# EAGLE board l1 (EAGLE 9.7.0)
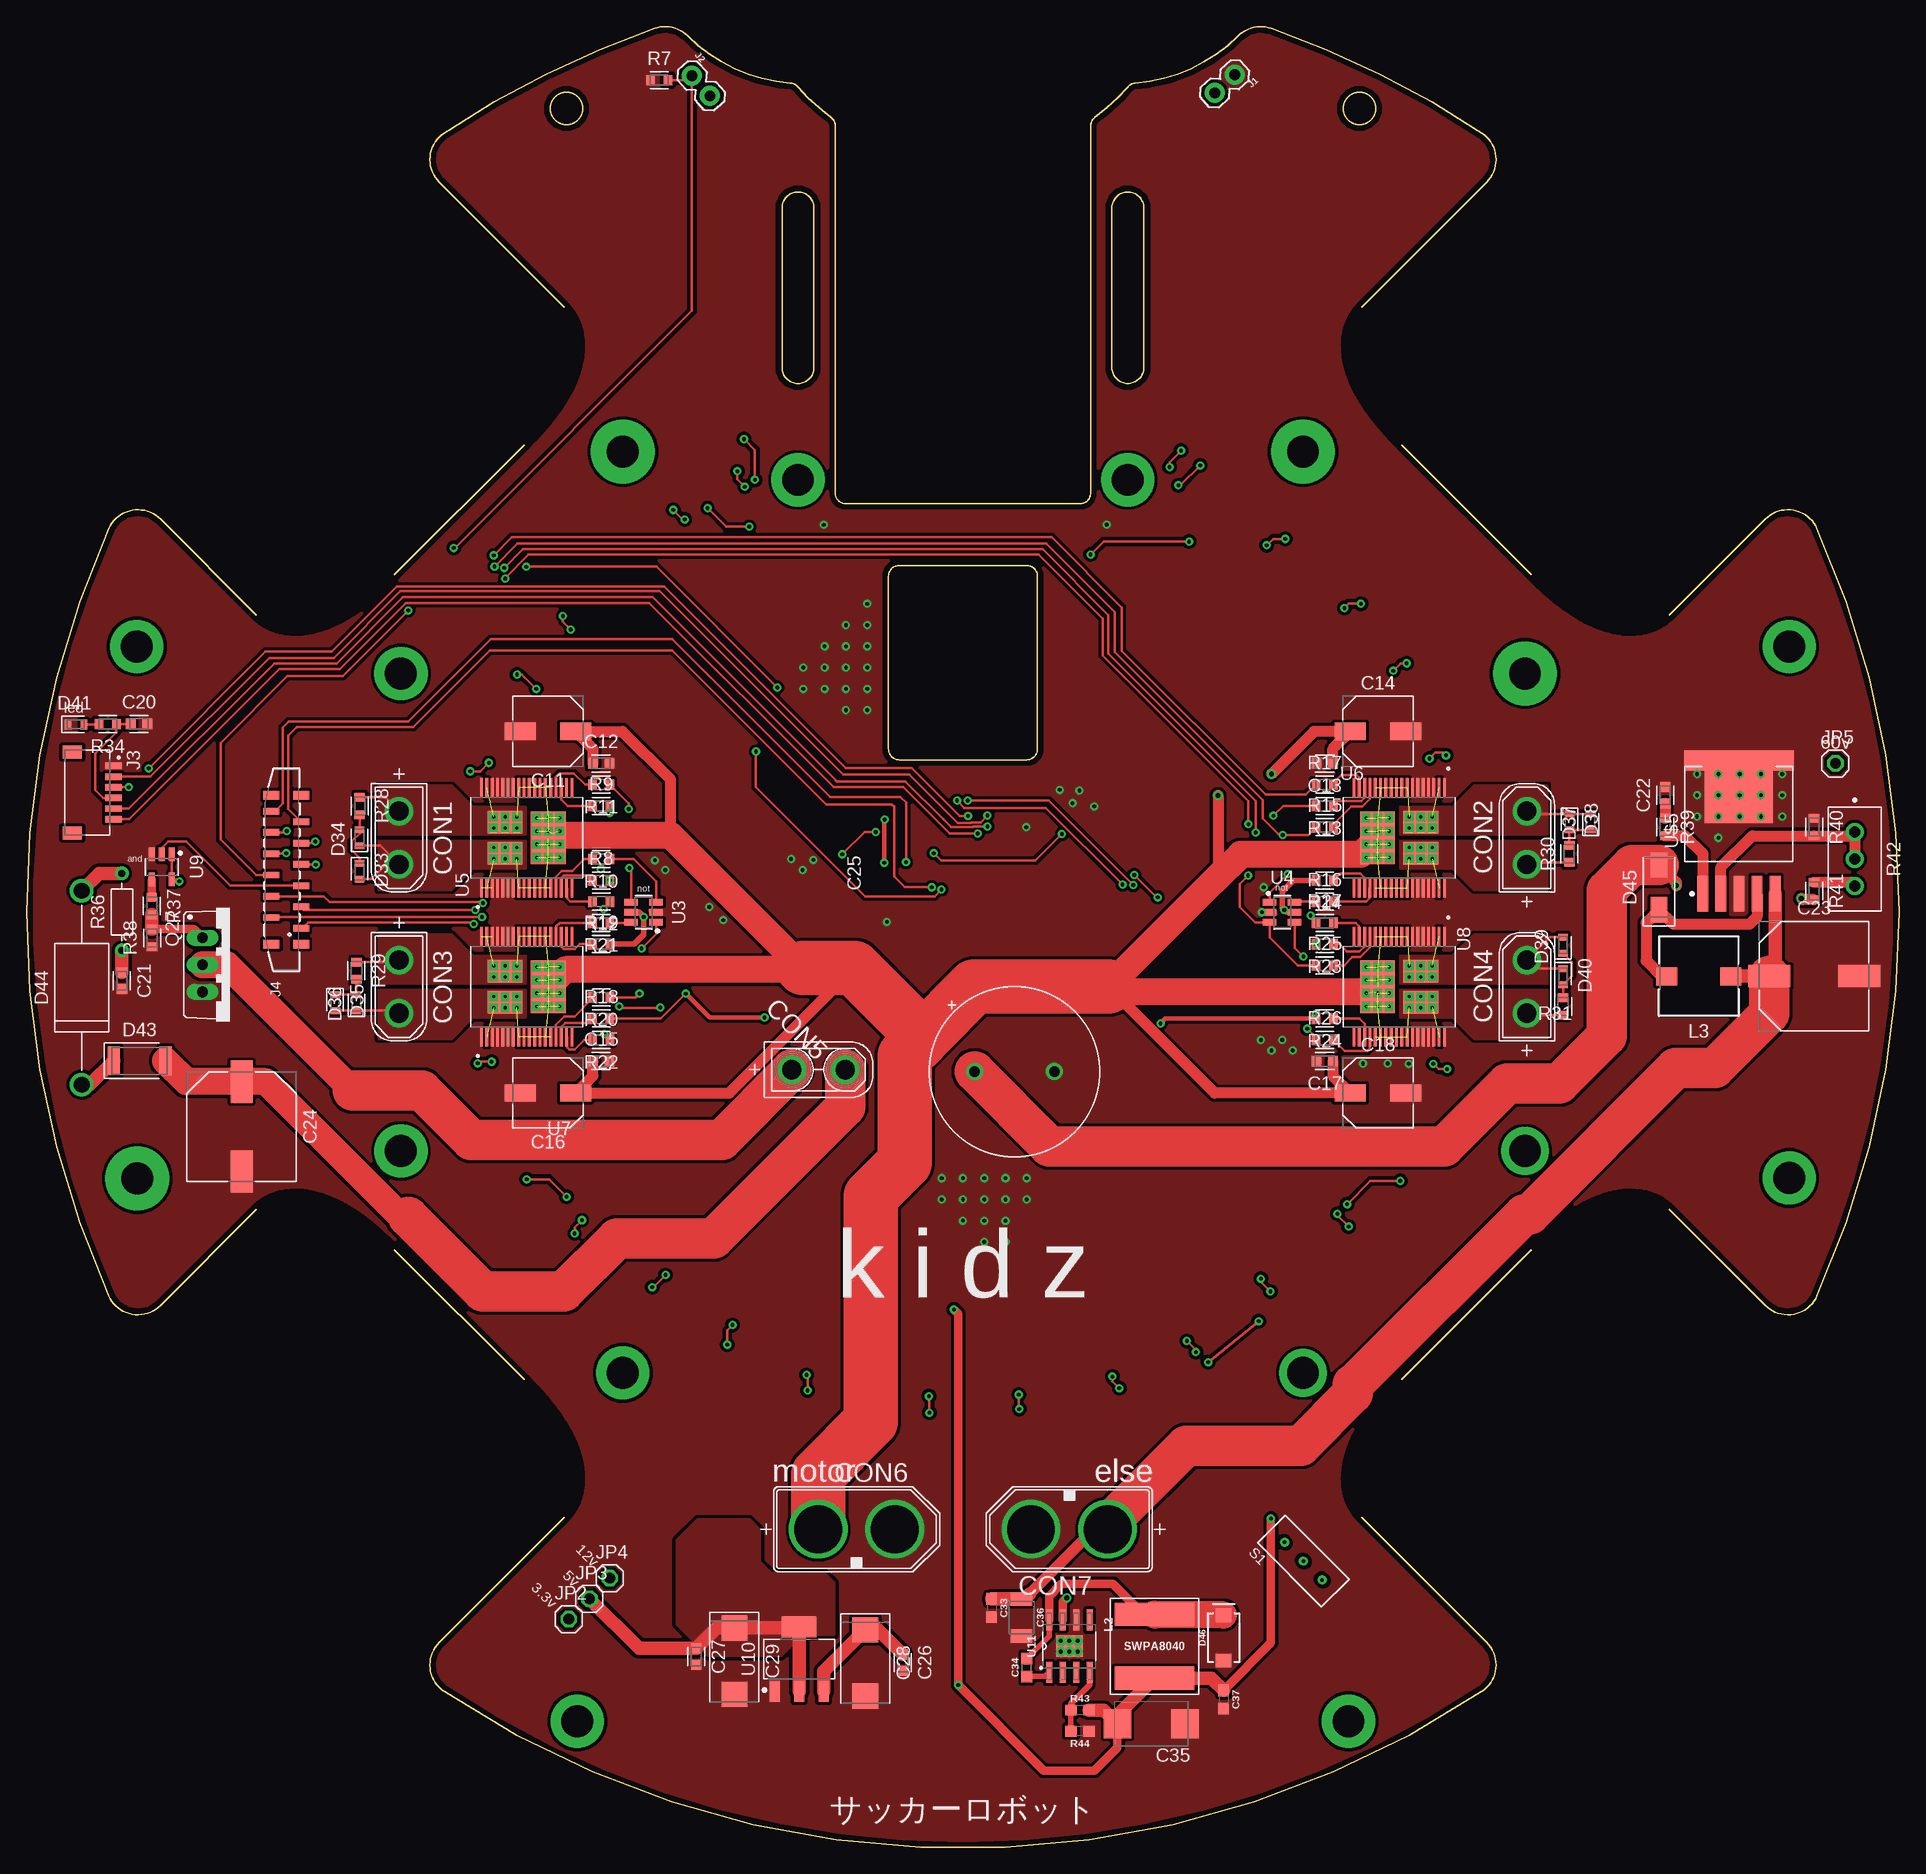
[diagram p0: board, top side]
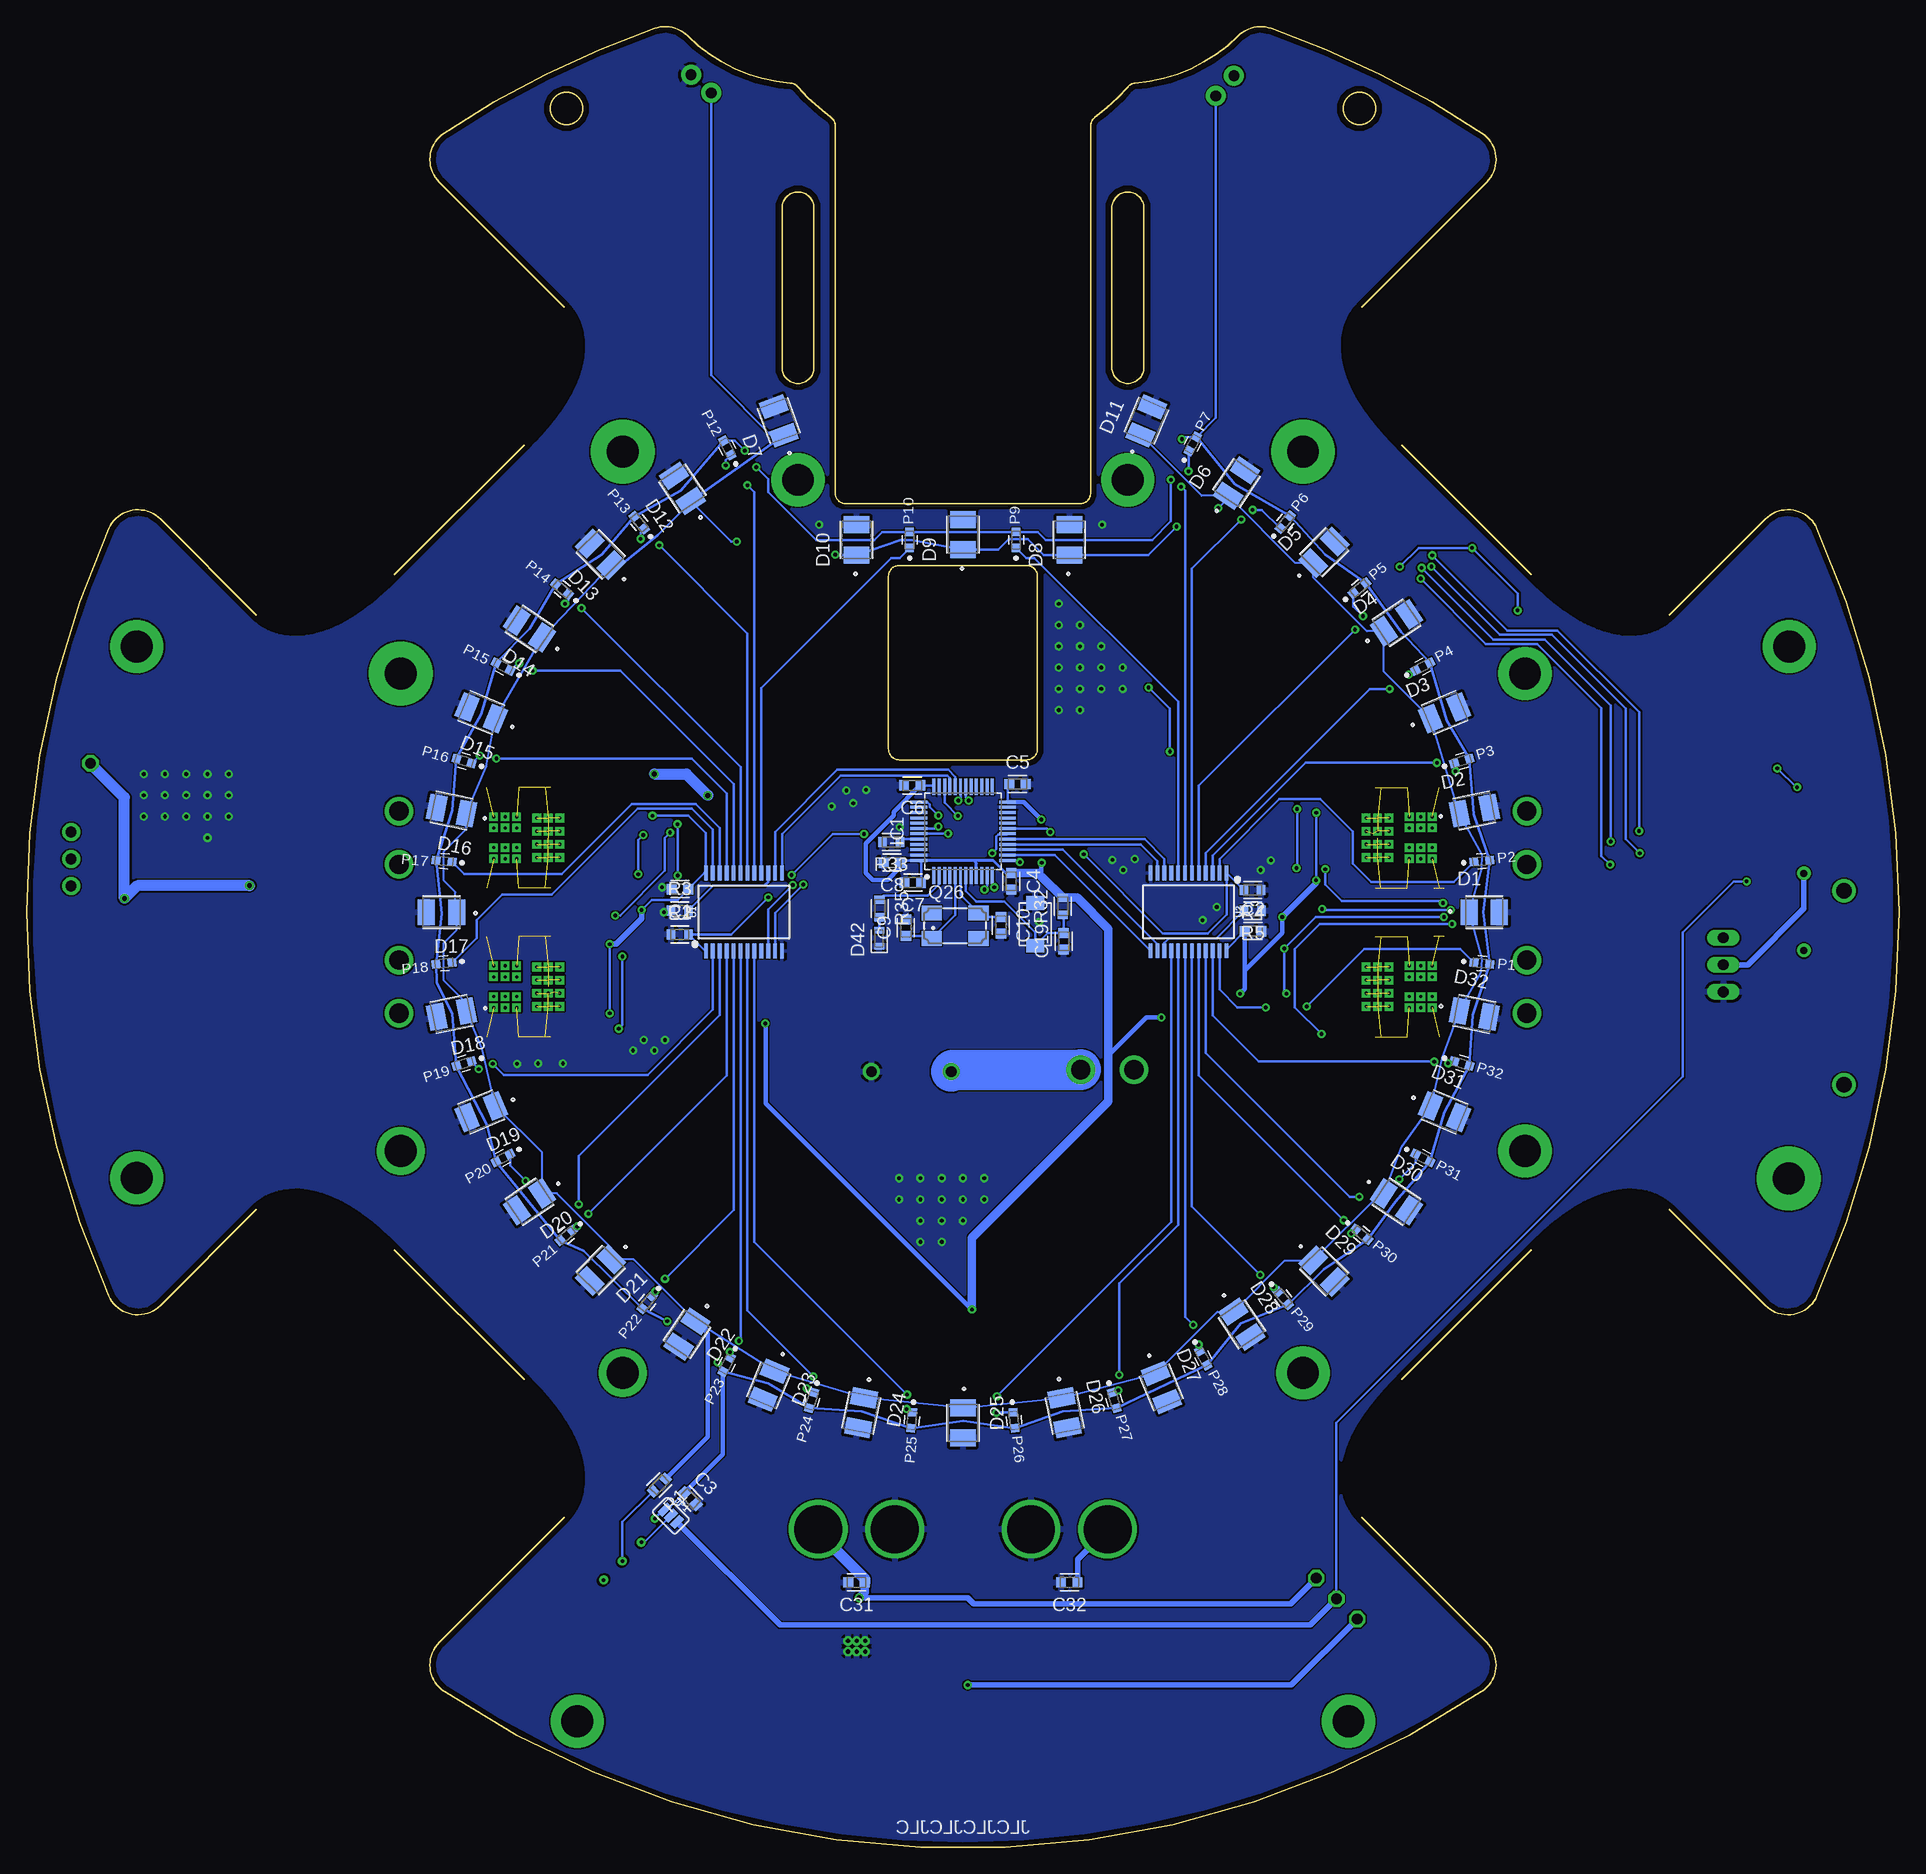
[diagram p1: board, bottom side, seen from below]

Size 176 x 171.17 mm. Coordinates in mm from the lower left corner, seen from the top.
Outline: 50.53,144.8 38.78,156.55 arc-101 39.24,161.16 arc-14 59.02,171 arc-64 62.13,170.3 arc40 71.78,165.86 arc-44 72.45,165.53 arc12 75.6,162.63 arc-53 76,161.83 76,127.32 arc90 77,126.32 99,126.32 arc90 100,127.32 100,161.83 arc-53 100.4,162.63 arc12 103.55,165.53 arc-44 104.22,165.86 arc40 113.87,170.3 arc-64 116.98,171 arc-14 136.76,161.16 arc-101 137.22,156.55 125.47,144.8
Outline: 46.75,131.83 34.57,119.64
Outline: 21.6,115.87 12.59,124.87 arc111 7.73,123.98 arc48 7.73,51.84 arc111 12.59,50.95 21.6,59.95
Outline: 34.57,56.18 46.75,43.99
Outline: 50.53,31.02 38.78,19.28 arc101 39.24,14.66 arc67 136.76,14.66 arc101 137.22,19.28 125.47,31.02
Outline: 129.25,43.99 141.43,56.18
Outline: 154.4,59.95 163.41,50.95 arc111 168.27,51.84 arc48 168.27,123.98 arc111 163.41,124.87 154.4,115.87
Outline: 141.43,119.64 129.25,131.83
Outline: 74,154.12 arc180 71,154.12 71,139.12 arc180 74,139.12 74,154.12
Outline: 95,119.51 arc90 94,120.51 82,120.51 arc90 81,119.51 81,103.24 arc90 82,102.24 94,102.24 arc90 95,103.24 95,119.51
Outline: 102,139.12 arc180 105,139.12 105,154.12 arc180 102,154.12 102,139.12
Outline: circle at 125.25,163.48 radius 1.5
Outline: circle at 50.75,163.48 radius 1.5
Copper layers (1*16): Top / Bottom
Stack-up Default Layer Stack: Top User Defined 0.035mm / Dielectric-1 User Defined 1.5mm / Bottom User Defined 0.035mm
Design rules: minimum copper width 6mil, minimum drill size 0.35mm, copper clearance wire_polygon to wire_polygon 6mil, copper clearance wire_polygon to pad_smd 6mil, copper clearance wire_polygon to via 6mil, copper clearance pad_smd to pad_smd 6mil, copper clearance pad_smd to via 6mil, copper clearance via to via 6mil, copper clearance smd to pad (same net) 6mil, copper clearance smd to via (same net) 6mil, copper clearance smd to smd (same net) 6mil, dimension clearance 20mil, restrict clearance 0mil, drill distance 6mil, keepout clearance 0mil

## Footprints (pad centres in the part's own frame; a part is rotated, then mirrored left to right if it is on the bottom)
CAPC1608X85 = smd 0.921 x 0.97: 1 -0.775,0; 2 0.775,0
6.3_X_7.7 = smd 2.917 x 1.622: 1 -2.6,0; 2 2.6,0
10_X_10.5 = smd 3.967 x 2.067: 1 -4.225,0; 2 4.225,0
16_X_25 = drill 1 pad 1.6: 1 -3.75,0; 2 3.75,0
CAPMP7343X310N = smd 2.368 x 2.404: 1 -3.121,0; 2 3.121,0
C0603 = smd 1.1 x 1: 1 -0.85,0; 2 0.85,0
D/7343-31R = smd 2.55 x 2.7: + 3.175,0; - -3.175,0
C1210 = smd 1.27 x 2.06: 1 -1.755,0; 2 1.755,0
XT30UPB-M = drill 1.8: + 2.5,0; - -2.5,0
XT30UPB-F = drill 1.8: + 2.5,0; - -2.5,0
XT60PB-M = drill 4.5: + 3.6,0; - -3.6,0
LED = smd 1.6 x 2.4: 1 -1.425,0; 2 1.425,0
LEDC1608X35N_FLAT-G = smd 0.612 x 0.912: A 0.75,0; C -0.75,0
DIOMELF5024 = smd 1.156 x 2.69: 1 -2.43,0; 2 2.43,0
DO-201AD = drill 1.47 pad 2.205: A 9.115,0; C -9.115,0
DIOM5226X290N = smd 2.392 x 1.565: 1 -2.108,0; 2 2.108,0
SMA-DIODE = smd 1.27 x 1.47: A -2.15,0; C 2.15,0
QFP50P900X900X160-48N = smd 1.559 x 0.28: 1 -4.178,2.75; 2 -4.178,2.25; 3 -4.178,1.75; 4 -4.178,1.25; 5 -4.178,0.75; 6 -4.178,0.25; 7 -4.178,-0.25; 8 -4.178,-0.75; 9 -4.178,-1.25; 10 -4.178,-1.75; 11 -4.178,-2.25; 12 -4.178,-2.75; 25 4.178,-2.75; 26 4.178,-2.25; 27 4.178,-1.75; 28 4.178,-1.25; 29 4.178,-0.75; 30 4.178,-0.25; 31 4.178,0.25; 32 4.178,0.75; 33 4.178,1.25; 34 4.178,1.75; 35 4.178,2.25; 36 4.178,2.75 | smd 0.28 x 1.559: 13 -2.75,-4.178; 14 -2.25,-4.178; 15 -1.75,-4.178; 16 -1.25,-4.178; 17 -0.75,-4.178; 18 -0.25,-4.178; 19 0.25,-4.178; 20 0.75,-4.178; 21 1.25,-4.178; 22 1.75,-4.178; 23 2.25,-4.178; 24 2.75,-4.178; 37 2.75,4.178; 38 2.25,4.178; 39 1.75,4.178; 40 1.25,4.178; 41 0.75,4.178; 42 0.25,4.178; 43 -0.25,4.178; 44 -0.75,4.178; 45 -1.25,4.178; 46 -1.75,4.178; 47 -2.25,4.178; 48 -2.75,4.178
1X02 = drill 1.016 pad 1.88: 1 0,0; 2 2.54,0
JST_SM06B-SRSS-TB(LF)(SN) = smd 0.6 x 1.55: 1 -2.5,0; 2 -1.5,0; 3 -0.5,0; 4 0.5,0; 5 1.5,0; 6 2.5,0 | smd 1.2 x 1.8: S1 -3.8,-3.875; S2 3.8,-3.875
686112183822 = smd 0.6 x 1.5: 1 -5.5,-1.8; 2 -4.5,1; 3 -3.5,-1.8; 4 -2.5,1; 5 -1.5,-1.8; 6 -0.5,1; 7 0.5,-1.8; 8 1.5,1; 9 2.5,-1.8; 10 3.5,1; 11 4.5,-1.8; 12 5.5,1 | smd 0.8 x 1.5: Z1 -7,-1.8; Z2 -7,1; Z3 7,-1.8; Z4 7,1
SMT-JUMPER_3_NO_SILK = smd 0.635 x 1.27: 1 -0.813,0; 2 0,0; 3 0.813,0
1X01 = drill 1.016 octagon: 1 0,0
SWPA8040 = smd 2.2 x 7.5: P1 -3,0; P2 3,0
WE-PD_7345R = smd 2 x 1.7: 1 -3,0; 2 3,0
ALS-PT19 = smd 0.8 x 0.8: 1 -0.75,0; 2 0.75,0
CTS406 = smd 1.9 x 1.4: 1 -2.2,-1.2; 2 2.2,-1.2; 3 2.2,1.2; 4 -2.2,1.2
TO220BV = drill 1.016 long: D 0,-2.54; G -2.54,-2.54; S 2.54,-2.54
RESC1608X60 = smd 0.799 x 0.974: 1 -0.815,0; 2 0.815,0
RESAD724W46L381D178B = drill 0.66 pad 1.26: 1 -3.62,0; 2 3.62,0
PV36X = drill 1 pad 1.7: 1 0,0; 2 2.54,0; 3 5.08,0
R0603 = smd 1.1 x 1: 1 -0.85,0; 2 0.85,0
SWITCH-TH = drill 0.33 slot 0.53: P$1 -2.5,0; P$2 0,0; P$3 2.5,0
SSOP24 = smd 0.348 x 1.397: 1 -3.575,-3.656; 2 -2.925,-3.656; 3 -2.275,-3.656; 4 -1.625,-3.656; 5 -0.975,-3.656; 6 -0.325,-3.656; 7 0.325,-3.656; 8 0.975,-3.656; 9 1.625,-3.656; 10 2.275,-3.656; 11 2.925,-3.656; 12 3.575,-3.656; 13 3.575,3.656; 14 2.925,3.656; 15 2.275,3.656; 16 1.625,3.656; 17 0.975,3.656; 18 0.325,3.656; 19 -0.325,3.656; 20 -0.975,3.656; 21 -1.625,3.656; 22 -2.275,3.656; 23 -2.925,3.656; 24 -3.575,3.656
SOT23-6 = smd 1.267 x 0.612: 1 -1.175,0.95; 2 -1.175,0; 3 -1.175,-0.95; 4 1.175,-0.95; 5 1.175,0; 6 1.175,0.95
SOP50P1030X247-39N = smd 1.79 x 0.35: 1 -4.715,4.25; 2 -4.715,3.75; 3 -4.715,3.25; 4 -4.715,2.75; 5 -4.715,2.25; 6 -4.715,1.75; 7 -4.715,1.25; 8 -4.715,0.75; 9 -4.715,0.25; 10 -4.715,-0.25; 11 -4.715,-0.75; 12 -4.715,-1.25; 13 -4.715,-1.75; 14 -4.715,-2.25; 15 -4.715,-2.75; 16 -4.715,-3.25; 17 -4.715,-3.75; 18 -4.715,-4.25; 19 4.715,-4.25; 20 4.715,-3.75; 21 4.715,-3.25; 22 4.715,-2.75; 23 4.715,-2.25; 24 4.715,-1.75; 25 4.715,-1.25; 26 4.715,-0.75; 27 4.715,-0.25; 28 4.715,0.25; 29 4.715,0.75; 30 4.715,1.25; 31 4.715,1.75; 32 4.715,2.25; 33 4.715,2.75; 34 4.715,3.25; 35 4.715,3.75; 36 4.715,4.25 | smd 2.1 x 3.25: 37 1.45,2.025; 38 -1.45,2.025 | drill 0.3 square: 37_1 1.975,0.942; 37_2 0.925,0.942; 37_3 1.975,2.025; 37_4 0.925,2.025; 37_5 1.975,3.108; 37_6 0.925,3.108; 38_1 -0.925,0.942; 38_2 -1.975,0.942; 38_3 -0.925,2.025; 38_4 -1.975,2.025; 38_5 -0.925,3.108; 38_6 -1.975,3.108; 39_1 1.856,-3.108; 39_2 0.619,-3.108; 39_3 -0.619,-3.108; 39_4 -1.856,-3.108; 39_5 1.856,-2.025; 39_6 0.619,-2.025; 39_7 -0.619,-2.025; 39_8 -1.856,-2.025; 39_9 1.856,-0.942; 39_10 0.619,-0.942; 39_11 -0.619,-0.942; 39_12 -1.856,-0.942 | smd 4.95 x 3.25: 39 0,-2.025
SOT23-5 = smd 1.267 x 0.577: 1 -1.175,0.95; 2 -1.175,0; 3 -1.175,-0.95; 4 1.175,-0.95; 5 1.175,0.95
SOT223 = smd 1.966 x 0.931: 1 -3.023,2.3; 2 -3.023,0; 3 -3.023,-2.3 | smd 1.966 x 3.241: 4 3.023,0
POWERPAD-SOIC-8 = smd 1.981 x 0.559: 1 -2.464,1.905; 2 -2.464,0.635; 3 -2.464,-0.635; 4 -2.464,-1.905; 5 2.464,-1.905; 6 2.464,-0.635; 7 2.464,0.635; 8 2.464,1.905 | smd 2.007 x 2.489: 9 0,0 | drill 0.381: P$1 -0.5,0.8; P$2 0.5,0.8; P$3 -0.5,0; P$4 0.5,0; P$5 -0.5,-0.8; P$6 0.5,-0.8
SMOL_TACTILE_3X4MM = smd 1.27 x 1.676: P$1 2,0; P$2 -2,0
TO263-5 = smd 3.357 x 1.017: 1 -5.905,3.4; 2 -5.905,1.7; 3 -5.905,0; 4 -5.905,-1.7; 5 -5.905,-3.4 | smd 6.847 x 6.397: 6 4.16,0 | smd 1.91 x 1.97: P$1 6.625,4.175; P$2 6.625,-4.175

## Placement (x,y rotation side)
C1  0.1 uF  [CAPC1608X85]  114.58,90.08 180 bottom
C2  0.1 uF  [CAPC1608X85]  60.73,86.13 0 bottom
C3  0.1 uF  [CAPC1608X85]  113.63,32.79 315 bottom
C4  0.1 uF  [CAPC1608X85]  83.45,90.83 270 bottom
C5  0.1 uF  [CAPC1608X85]  82.88,99.96 0 bottom
C6  0.1 uF  [CAPC1608X85]  92.76,99.83 180 bottom
C7  0.1 uF  [CAPC1608X85]  92.71,90.69 180 bottom
C8  4.7 uF  [CAPC1608X85]  94.67,92.57 180 bottom
C9  20 pF  [CAPC1608X85]  93.35,86.45 90 bottom
C10  20 pF  [CAPC1608X85]  84.42,86.68 270 bottom
C11  470 uF  [6.3_X_7.7]  49,104.91 180 top
C12  0.1 uF  [CAPC1608X85]  54,101.91 0 top
C13  0.1 uF  [CAPC1608X85]  122,101.91 180 top
C14  470 uF  [6.3_X_7.7]  127,104.91 0 top
C15  0.1 uF  [CAPC1608X85]  54,73.91 0 top
C16  470 uF  [6.3_X_7.7]  49,70.91 180 top
C17  0.1 uF  [CAPC1608X85]  122,73.91 180 top
C18  470 uF  [6.3_X_7.7]  127,70.91 0 top
C19  0.1 uF  [CAPC1608X85]  78.54,85.19 90 bottom
C20  0.1 uF  [CAPC1608X85]  10.57,105.62 0 top
C21  1500 pF  [CAPC1608X85]  8.96,81.47 270 top
C22  1 uF  [CAPC1608X85]  154,98.91 90 top
C23  100UF10X10.5  [10_X_10.5]  168,81.91 0 top
C24  100UF10X10.5  [10_X_10.5]  20.2,67.76 270 top
C25  1000UF  [16_X_25]  92.85,72.94 0 top
C26  0.1 uF  [CAPC1608X85]  82.33,17.38 270 top
C27  0.1 uF  [CAPC1608X85]  62.93,17.93 270 top
C28  100 uF  [CAPMP7343X310N]  78.82,17.34 270 top
C29  100 uF  [CAPMP7343X310N]  66.52,17.5 270 top
C31  0.1 uF  [CAPC1608X85]  98,24.91 180 bottom
C32  0.1 uF  [CAPC1608X85]  78,24.91 180 bottom
C33  4.7uF  [C0603]  90.7,22.51 270 top
C34  10.0nF  [C0603]  94,16.91 90 top
C35  220uF  [D/7343-31R]  105.7,11.61 180 top
C36  22.0uF  [C1210]  93.5,21.61 270 top
C37  0.1uF  [C0603]  112.5,13.91 270 top
CON1  [XT30UPB-M]  35,94.91 90 top
CON2  [XT30UPB-M]  141,94.91 270 top
CON3  [XT30UPB-M]  35,80.91 90 top
CON4  [XT30UPB-M]  141,80.91 270 top
CON5  [XT30UPB-F]  74.43,73.11 180 top
CON6  XT60PB-M  [XT60PB-M]  78,29.91 180 top
CON7  XT60PB-M  [XT60PB-M]  98,29.91 0 top
D1  [LED]  39,87.91 0 bottom
D2  [LED]  39.94,97.47 11.3 bottom
D3  [LED]  42.73,106.66 22.5 bottom
D4  [LED]  47.26,115.13 33.8 bottom
D5  [LED]  54.05,121.76 45 bottom
D6  [LED]  62.28,128.25 56.3 bottom
D7  [LED]  105.3,134.11 110 bottom
D8  [LED]  78,122.91 90 bottom
D9  [LED]  88,123.41 90 bottom
D10  [LED]  98,122.91 90 bottom
D11  [LED]  70.75,134.11 67 bottom
D12  [LED]  114.37,127.75 123.8 bottom
D13  [LED]  122.05,121.56 135 bottom
D14  [LED]  128.74,114.53 146.3 bottom
D15  [LED]  133.27,106.66 157.5 bottom
D16  [LED]  136.06,97.47 168.8 bottom
D17  [LED]  137,87.91 180 bottom
D18  [LED]  136.06,78.35 191.3 bottom
D19  [LED]  133.27,69.16 202.5 bottom
D20  [LED]  128.74,60.69 213.8 bottom
D21  [LED]  122.05,54.26 225 bottom
D22  [LED]  113.92,48.27 236.3 bottom
D23  [LED]  106.25,43.44 247.5 bottom
D24  [LED]  97.56,40.85 258.8 bottom
D25  [LED]  88,39.91 270 bottom
D26  [LED]  78.44,40.85 281.3 bottom
D27  [LED]  69.35,43.24 292.5 bottom
D28  [LED]  61.78,49.17 303.8 bottom
D29  [LED]  54.05,54.16 315 bottom
D30  [LED]  47.26,60.69 326.3 bottom
D31  [LED]  42.73,69.16 337.5 bottom
D32  [LED]  39.94,78.35 348.8 bottom
D33  [LEDC1608X35N_FLAT-G]  31.3,91.76 270 top
D34  [LEDC1608X35N_FLAT-G]  31.3,94.91 90 top
D35  [LEDC1608X35N_FLAT-G]  29,79.41 270 top
D36  [LEDC1608X35N_FLAT-G]  31,79.41 90 top
D37  [LEDC1608X35N_FLAT-G]  147,96.41 90 top
D38  [LEDC1608X35N_FLAT-G]  145,96.41 270 top
D39  [LEDC1608X35N_FLAT-G]  144.4,84.81 90 top
D40  [LEDC1608X35N_FLAT-G]  144.4,81.86 270 top
D41  [LEDC1608X35N_FLAT-G]  4.63,105.56 0 top
D42  [LEDC1608X35N_FLAT-G]  95.87,85.45 90 bottom
D43  zm4728  [DIOMELF5024]  10.61,73.95 0 top
D44  1n5401  [DO-201AD]  5.18,80.82 90 top
D45  ss510  [DIOM5226X290N]  153.41,90.24 90 top
D46  3A/40V/500mV  [SMA-DIODE]  112.5,19.71 90 top
IC1  [QFP50P900X900X160-48N]  87.98,95.54 90 bottom
J1  [1X02]  113.56,166.63 221.9 top
J2  [1X02]  62.53,166.54 311.9 top
J3  [JST_SM06B-SRSS-TB(LF)(SN)]  8.16,99.16 270 top
J4  686112183822  [686112183822]  24,91.91 90 top
JP1  [SMT-JUMPER_3_NO_SILK]  115.45,31.18 315 bottom
JP2  PINHD-1X1  [1X01]  50.95,21.46 0 top
JP3  PINHD-1X1  [1X01]  52.9,23.36 0 top
JP4  PINHD-1X1  [1X01]  54.8,25.31 0 top
JP5  PINHD-1X1  [1X01]  170,101.91 0 top
L2  SWPA8040/10uH  [SWPA8040]  106,18.91 270 top
L3  56uh  [WE-PD_7345R]  157.15,81.88 180 top
P1  [ALS-PT19]  39.24,83.11 354.4 bottom
P2  [ALS-PT19]  39.24,92.71 5.6 bottom
P3  [ALS-PT19]  41.11,102.13 16.9 bottom
P4  [ALS-PT19]  44.79,111.01 28.1 bottom
P5  [ALS-PT19]  50.72,118.4 39.4 bottom
P6  [ALS-PT19]  57.71,124.59 50.6 bottom
P7  [ALS-PT19]  66.4,131.92 61.9 bottom
P9  [ALS-PT19]  83,122.91 90 bottom
P10  [ALS-PT19]  93,122.91 90 bottom
P12  [ALS-PT19]  110.15,131.57 118.1 bottom
P13  [ALS-PT19]  118.44,124.54 129.4 bottom
P14  [ALS-PT19]  125.68,118.3 140.6 bottom
P15  [ALS-PT19]  131.21,111.01 151.9 bottom
P16  [ALS-PT19]  134.89,102.13 163.1 bottom
P17  [ALS-PT19]  136.76,92.71 174.4 bottom
P18  [ALS-PT19]  136.76,83.11 185.6 bottom
P19  [ALS-PT19]  134.89,73.69 196.9 bottom
P20  [ALS-PT19]  131.21,64.81 208.1 bottom
P21  [ALS-PT19]  125.28,57.52 219.4 bottom
P22  [ALS-PT19]  117.69,51.23 230.6 bottom
P23  [ALS-PT19]  110.2,45.4 241.9 bottom
P24  [ALS-PT19]  102.22,42.02 253.1 bottom
P25  [ALS-PT19]  92.8,40.15 264.4 bottom
P26  [ALS-PT19]  83.2,40.15 275.6 bottom
P27  [ALS-PT19]  73.78,42.02 286.9 bottom
P28  [ALS-PT19]  65.4,46 298.1 bottom
P29  [ALS-PT19]  57.91,51.63 309.4 bottom
P30  [ALS-PT19]  50.52,57.62 320.6 bottom
P31  [ALS-PT19]  44.79,64.81 331.9 bottom
P32  [ALS-PT19]  41.11,73.69 343.1 bottom
Q26  8Mhz  [CTS406]  88.74,86.64 0 bottom
Q27  IRLB3036PbF  [TO220BV]  19.08,82.97 270 top
R1  100  [RESC1608X60]  116.53,34.06 225 bottom
R2  10k  [RESC1608X60]  114.6,85.82 0 bottom
R3  10k  [RESC1608X60]  114.61,88.07 0 bottom
R4  10k  [RESC1608X60]  60.78,90 180 bottom
R5  10k  [RESC1608X60]  60.77,88.05 180 bottom
R7  10k  [RESC1608X60]  59.46,166.12 0 top
R8  1k  [RESC1608X60]  54,90.91 0 top
R9  1k  [RESC1608X60]  54,97.91 0 top
R10  1k  [RESC1608X60]  54,92.91 180 top
R11  1k  [RESC1608X60]  54,99.91 180 top
R12  10k  [RESC1608X60]  54,88.91 180 top
R13  1k  [RESC1608X60]  122,97.91 180 top
R14  1k  [RESC1608X60]  122,90.91 180 top
R15  1k  [RESC1608X60]  122,95.91 0 top
R16  1k  [RESC1608X60]  122,88.91 0 top
R17  10k  [RESC1608X60]  122,99.91 0 top
R18  1k  [RESC1608X60]  54,77.91 0 top
R19  1k  [RESC1608X60]  54,84.91 0 top
R20  1k  [RESC1608X60]  54,79.91 180 top
R21  1k  [RESC1608X60]  54,86.91 180 top
R22  10k  [RESC1608X60]  54,75.91 180 top
R23  1k  [RESC1608X60]  122,84.91 180 top
R24  1k  [RESC1608X60]  122,77.91 180 top
R25  1k  [RESC1608X60]  122,82.91 0 top
R26  1k  [RESC1608X60]  122,75.91 0 top
R27  10k  [RESC1608X60]  122,86.91 0 top
R28  ?  [RESC1608X60]  31.3,97.91 270 top
R29  ?  [RESC1608X60]  31,82.41 270 top
R30  20  [RESC1608X60]  145,93.41 90 top
R31  20  [RESC1608X60]  144.4,79.06 90 top
R32  10k  [RESC1608X60]  78.62,88.47 90 bottom
R33  10k  [RESC1608X60]  94.75,94.51 180 bottom
R34  100  [RESC1608X60]  7.62,105.6 180 top
R35  100  [RESC1608X60]  95.83,88.26 270 bottom
R36  20  [RESAD724W46L381D178B]  8.96,87.94 90 top
R37  1k  [RESC1608X60]  11.76,88.49 270 top
R38  10k  [RESC1608X60]  11.79,85.5 90 top
R39  2.94k  [RESC1608X60]  154,95.91 270 top
R40  1.5k  [RESC1608X60]  168,95.91 270 top
R41  57k  [RESC1608X60]  168,89.91 270 top
R42  10k  [PV36X]  171.82,95.45 270 top
R43  10k  [R0603]  99,12.91 0 top
R44  5.9k  [R0603]  99,10.91 180 top
S1  [SWITCH-TH]  120,26.91 315 top
U1  [SSOP24]  108.58,87.93 0 bottom
U2  [SSOP24]  66.8,87.95 180 bottom
U3  [SOT23-6]  58,87.91 180 top
U4  [SOT23-6]  118,87.91 0 top
U5  [SOP50P1030X247-39N]  47,94.91 90 top
U6  [SOP50P1030X247-39N]  129,94.91 270 top
U7  [SOP50P1030X247-39N]  47,80.91 90 top
U8  [SOP50P1030X247-39N]  129,80.91 270 top
U9  [SOT23-5]  12.7,92.17 270 top
U10  [SOT223]  72.61,17.71 90 top
U11  TPS5430  [POWERPAD-SOIC-8]  98,18.91 90 top
U$1  [SMOL_TACTILE_3X4MM]  81.22,86.78 90 bottom
U$5  [TO263-5]  160.93,95.55 90 top

## Library data of the parts
C1-C10 C12 C13 C15 C17 C19-C22 C26-C29 C31 C32 = Capacitor; CATEGORY: Capacitor
C11 C14 C16 C18 C23-C25 S1 U3 U4 U9 U10 U$5 = i want to make my own parts
C33 C34 C36 C37 L2 R43 R44 U11 = JH
C35 = rcl; SPICEPREFIX: C
CON1-CON7 = amass xt series
D1-D32 = 3528 led
D33-D42 = LED; CATEGORY: LED; COLOR: GREEN; DESCRIPTION: CHIP LED FLAT; SUB-CATEGORY: CHIP; TYPE: FLAT_TOP
D43 = Diode; CATEGORY: Diode; SUB-CATEGORY: Zener
D44 D45 = diodess
D46 = SparkFun-DiscreteSemi; PROD_ID: DIO-09886
IC1 = IC_Embedded; CATEGORY: IC_Embedded; MANUFACTURER: ST Microelectronics; MPN: STM32F103C6T7A; OPERATING_TEMP: -40 to 105 °C; PART_STATUS: Active; SUB-CATEGORY: Microcontroller; THERMALLOSS: 0.44W
J1 J2 = SparkFun-Connectors
J3 = SM06B-SRSS-TB_LF__SN_; MANUFACTURER: JST; STANDARD: Manufacturer Recommendation
J4 = Wurth_Connectors_WR-FPC; CONTACT-RESISTANCE: 30mOhm; DATASHEET-URL: https://www.we-online.com/catalog/datasheet/686112183822.pdf; IR: 1A; L: 18.8mm; MATE-WITH: WR-FFC 1.00 mm Flat Flexible Cable Type 1 (Contacts on same side)/ Type 2 (Contacts opposite); PACKAGING: Tape and Reel; PART-NUMBER: 686112183822; PINS: 12; PITCH: 1mm; TYPE: Vertical; WORKING-VOLTAGE: 125V(AC)
JP1 = SparkFun-Jumpers
JP2-JP5 = Connector; CATEGORY: CONNECTOR; SUB-CATEGORY: PIN-HEADER
L3 = Wurth_Power Magnetics_WE-PD; DATASHEET-URL: https://www.we-online.com/redexpert/spec/7447779001?ae; FRES: 100MHz; IR: 5.3A; ISAT: 9.5A; MOUNT: SMT; PART-NUMBER: 7447779001; RDC-MAX: 15mohm; RDC-TYP: 10mohm; SIZE: 7345; VERSION: Robust
P1-P7 P9 P10 P12-P32 = TR8
Q26 = crystal; OC_FARNELL: unknown; OC_NEWARK: unknown
Q27 = Transistor; CATEGORY: Transistor; SUB-CATEGORY: MOSFET; TYPE: N-Channel
R1-R5 R7-R41 = Resistor; CATEGORY: Resistor; SUB-CATEGORY: Fixed
R42 = Resistor; CATEGORY: Resistor; DESCRIPTION: Lead Sealed Type Multiturn PV36 Series; MANUFACTURER: BOURNS; MPN: PV36X; OPERATING_TEMPERATURE: -55 to +125 °C; PART_STATUS: Active; ROHS_COMPLIANCE: RoHS Compliant; SERIES: PV36; SUB-CATEGORY: Trimpot; TYPE: Lead sealed
U1 U2 = SparkFun-IC-Logic; PROD_ID: IC-08252
U5-U8 = VNH5050A-E; A1_MIN: 0.0; A_MAX: 2.47; A_MIN: 2.47; A_NOM: 2.47; B_MAX: 0.36; B_MIN: 0.18; B_NOM: 0.27; D2_MAX: 0.0; D_MAX: 10.5; D_MIN: 10.1; D_NOM: 10.3; E1_MAX: 7.6; E1_MIN: 7.4; E1_NOM: 7.5; E2_MAX: 0.0; ENOM: 0.5; E_MAX: 10.5; E_MIN: 10.1; E_NOM: 10.3; L_MAX: 1.0; L_MIN: 0.6; L_NOM: 0.8; MANUFACTURER: ST Microelectronics; PARTREV: 1.0; PIN_COUNT: 36.0; STANDARD: IPC 7351B
U$1 = smolswitch

## Nets
1S0: IC1.31 U1.10
1S1: IC1.30 U1.11
1S2: IC1.32 U1.14
1S3: IC1.33 U1.13
2S0: IC1.17 U2.10
2S1: IC1.16 U2.11
2S2: IC1.15 U2.14
2S3: IC1.14 U2.13
12V: C23.1 C31.1 C33.1 C36.1 CON7.+ JP4.1 L3.1 U11.7 U$5.5
+3.3V: C1.1 C2.1 C3.1 C4.1 C5.1 C6.1 C7.1 C8.1 C35.+ C37.1 IC1.9 IC1.24 IC1.36 IC1.48 J2.2 JP1.1 JP2.1 L2.P2 P1.2 P2.2 P3.2 P4.2 P5.2 P6.2 P7.2 P9.2 P10.2 P12.2 P13.2 P14.2 P15.2 P16.2 P17.2 P18.2 P19.2 P20.2 P21.2 P22.2 P23.2 P24.2 P25.2 P26.2 P27.2 P28.2 P29.2 P30.2 P31.2 P32.2 R8.2 R9.2 R13.2 R14.2 R18.2 R19.2 R23.2 R24.2 R32.2 R43.2 U1.24 U2.24 U3.5 U4.5
+5V: C27.1 C29.1 JP1.3 JP3.1 U9.1 U9.5 U10.2 U10.4
+12V: C26.1 C28.1 U10.3
BOOT: IC1.44 R33.1
COM1: IC1.18 R2.2 U1.1
COM2: IC1.19 R4.2 U2.1
GND: C1.2 C2.2 C3.2 C4.2 C5.2 C6.2 C7.2 C8.2 C9.2 C10.2 C11.2 C12.2 C13.2 C14.2 C15.2 C16.2 C17.2 C18.2 C19.1 C20.2 C21.2 C22.2 C23.2 C24.2 C25.2 C26.2 C27.2 C28.2 C29.2 C31.2 C32.2 C33.2 C35.- C36.2 C37.2 CON6.- CON7.- D1.2 D2.2 D3.2 D4.2 D5.2 D6.2 D7.2 D8.2 D9.2 D10.2 D11.2 D12.2 D13.2 D14.2 D15.2 D16.2 D17.2 D18.2 D19.2 D20.2 D21.2 D22.2 D23.2 D24.2 D25.2 D26.2 D27.2 D28.2 D29.2 D30.2 D31.2 D32.2 D41.C D42.C D46.A IC1.8 IC1.23 IC1.35 IC1.47 J1.1 J3.1 Q27.S R2.1 R3.1 R4.1 R5.1 R7.1 R33.2 R38.1 R40.1 R44.1 U1.12 U2.12 U3.2 U4.2 U5.1 U5.3 U5.4 U5.5 U5.6 U5.7 U5.30 U5.31 U5.32 U5.33 U5.34 U5.36 U6.1 U6.3 U6.4 U6.5 U6.6 U6.7 U6.30 U6.31 U6.32 U6.33 U6.34 U6.36 U7.1 U7.3 U7.4 U7.5 U7.6 U7.7 U7.30 U7.31 U7.32 U7.33 U7.34 U7.36 U8.1 U8.3 U8.4 U8.5 U8.6 U8.7 U8.30 U8.31 U8.32 U8.33 U8.34 U8.36 U9.3 U10.1 U11.6 U11.9 U11.P$1 U11.P$2 U11.P$3 U11.P$4 U11.P$5 U11.P$6 U$1.P$1 U$5.3 U$5.6 U$5.P$1 U$5.P$2
INA1: J4.4 R10.1 U3.3
INA2: J4.8 R15.1 U4.1
INA3: J4.2 R20.1 U3.1
INA4: J4.7 R25.1 U4.3
INB1: R11.1 U3.4
INB2: R16.1 U4.6
INB3: R21.1 U3.6
INB4: R26.1 U4.4
KICKER: J4.5 U9.2
KICKER_5V: R37.1 U9.4
LG: IC1.11 J2.1 J4.6 R7.2
MOTOR_12V: C11.1 C12.1 C13.1 C14.1 C15.1 C16.1 C17.1 C18.1 C32.1 CON6.+ U5.13 U5.24 U5.39 U5.39_1 U5.39_2 U5.39_3 U5.39_4 U5.39_5 U5.39_6 U5.39_7 U5.39_8 U5.39_9 U5.39_10 U5.39_11 U5.39_12 U6.13 U6.24 U6.39 U6.39_1 U6.39_2 U6.39_3 U6.39_4 U6.39_5 U6.39_6 U6.39_7 U6.39_8 U6.39_9 U6.39_10 U6.39_11 U6.39_12 U7.13 U7.24 U7.39 U7.39_1 U7.39_2 U7.39_3 U7.39_4 U7.39_5 U7.39_6 U7.39_7 U7.39_8 U7.39_9 U7.39_10 U7.39_11 U7.39_12 U8.13 U8.24 U8.39 U8.39_1 U8.39_2 U8.39_3 U8.39_4 U8.39_5 U8.39_6 U8.39_7 U8.39_8 U8.39_9 U8.39_10 U8.39_11 U8.39_12
N$1: JP1.2 S1.P$1
N$2: R3.2 U1.15
N$3: R10.2 U5.15
N$4: R11.2 U5.22
N$5: R12.2 U5.17
N$6: R8.1 U5.16
N$7: R9.1 U5.21
N$8: D1.1 D2.1 D3.1 D4.1 D5.1 D6.1 D7.1 D8.1 D9.1 D10.1 D11.1 D12.1 D13.1 D14.1 D15.1 D16.1 D17.1 D18.1 D19.1 D20.1 D21.1 D22.1 D23.1 D24.1 D25.1 D26.1 D27.1 D28.1 D29.1 D30.1 D31.1 D32.1 J1.2 R1.1
N$9: R5.2 U2.15
N$10: R1.2 S1.P$2
N$11: D35.C D36.A R29.2
N$12: P25.1 U1.8
N$13: P17.1 U1.22
N$14: P18.1 U1.23
N$15: D33.C D34.A R28.2
N$16: P19.1 U1.2
N$17: P20.1 U1.3
N$18: P21.1 U1.4
N$19: P22.1 U1.5
N$21: P23.1 U1.6
N$22: P24.1 U1.7
N$23: P10.1 U1.16
N$24: P12.1 U1.17
N$25: P13.1 U1.18
N$26: P14.1 U1.19
N$27: P15.1 U1.20
N$28: P16.1 U1.21
N$29: P9.1 U2.8
N$30: P1.1 U2.23
N$31: P2.1 U2.2
N$32: P3.1 U2.3
N$33: P4.1 U2.4
N$34: P5.1 U2.5
N$35: P6.1 U2.6
N$36: P7.1 U2.7
N$37: P26.1 U2.16
N$38: P27.1 U2.17
N$39: P28.1 U2.18
N$40: P29.1 U2.19
N$41: P30.1 U2.20
N$42: P31.1 U2.21
N$43: P32.1 U2.22
N$45: C34.2 D46.C L2.P1 U11.8
N$46: D41.A R34.2
N$47: R15.2 U6.15
N$48: R16.2 U6.22
N$49: R17.2 U6.17
N$50: R13.1 U6.16
N$51: R14.1 U6.21
N$52: D42.A R35.2
N$54: D37.C D38.A R30.2
N$56: CON5.+ D44.A Q27.D R36.2
N$57: R20.2 U7.15
N$58: C21.1 R36.1
N$59: R21.2 U7.22
N$60: R22.2 U7.17
N$61: R18.1 U7.16
N$62: R19.1 U7.21
N$63: D39.C D40.A R31.2
N$64: D43.1 D44.C
N$65: Q27.G R37.2 R38.2
N$66: D45.1 L3.2 U$5.4
N$67: R39.2 U$5.1
N$68: R25.2 U8.15
N$69: R26.2 U8.22
N$70: R27.2 U8.17
N$71: R23.1 U8.16
N$72: R24.1 U8.21
N$73: C22.1 R39.1
N$74: R41.1 R42.3
N$75: R40.2 R42.1 R42.2 U$5.2
N$96: R43.1 R44.2 U11.4
N$97: C34.1 U11.1
O_IN: C9.1 IC1.5 Q26.1
O_OUT: C10.1 IC1.6 Q26.3
OA1: CON1.- D33.A D34.C U5.2 U5.8 U5.9 U5.10 U5.11 U5.12 U5.14 U5.38 U5.38_1 U5.38_2 U5.38_3 U5.38_4 U5.38_5 U5.38_6
OA2: CON2.- D37.A D38.C U6.2 U6.8 U6.9 U6.10 U6.11 U6.12 U6.14 U6.38 U6.38_1 U6.38_2 U6.38_3 U6.38_4 U6.38_5 U6.38_6
OA3: CON3.- D35.A D36.C U7.2 U7.8 U7.9 U7.10 U7.11 U7.12 U7.14 U7.38 U7.38_1 U7.38_2 U7.38_3 U7.38_4 U7.38_5 U7.38_6
OA4: CON4.- D39.A D40.C U8.2 U8.8 U8.9 U8.10 U8.11 U8.12 U8.14 U8.38 U8.38_1 U8.38_2 U8.38_3 U8.38_4 U8.38_5 U8.38_6
OB1: CON1.+ R28.1 U5.23 U5.25 U5.26 U5.27 U5.28 U5.29 U5.35 U5.37 U5.37_1 U5.37_2 U5.37_3 U5.37_4 U5.37_5 U5.37_6
OB2: CON2.+ R30.1 U6.23 U6.25 U6.26 U6.27 U6.28 U6.29 U6.35 U6.37 U6.37_1 U6.37_2 U6.37_3 U6.37_4 U6.37_5 U6.37_6
OB3: CON3.+ R29.1 U7.23 U7.25 U7.26 U7.27 U7.28 U7.29 U7.35 U7.37 U7.37_1 U7.37_2 U7.37_3 U7.37_4 U7.37_5 U7.37_6
OB4: CON4.+ R31.1 U8.23 U8.25 U8.26 U8.27 U8.28 U8.29 U8.35 U8.37 U8.37_1 U8.37_2 U8.37_3 U8.37_4 U8.37_5 U8.37_6
PC13: IC1.2 R35.1
PWM1: J4.3 R12.1
PWM2: J4.10 R17.1
PWM3: J4.1 R22.1
PWM4: J4.9 R27.1
RST: C19.2 IC1.7 R32.1 U$1.P$2
RX1: IC1.43 J3.6
RX2: IC1.13 J4.12
SWCLK: IC1.37 J3.2
SWD_3V3: C20.1 J3.4 R34.1
SWDIO: IC1.34 J3.3
TX1: IC1.42 J3.5
TX2: IC1.12 J4.11
VBAT: IC1.1
VCC: C24.1 C25.1 CON5.- D43.2 D45.2 JP5.1 R41.2

## Tracks (layer width: path | path; a pad name or v marks a point on that pad's centre or on a via)
1S0  (via drill 0.35)
  Top 0.254: v104,90.46 96.05,98.41 v88.45,98.41
  Bottom 0.254: U1.10 106.31,88.16 v104,90.46 | v88.45,98.41 88.23,98.63 IC1.31
1S1  (via drill 0.35)
  Top 0.254: v87.45,98.41 88.15,97.71 95.8,97.71 v103,90.51
  Bottom 0.254: IC1.30 87.73,98.74 87.45,98.46 v87.45,98.41 | v103,90.51 105.66,87.86 U1.11
1S2
  Bottom 0.254: IC1.32 88.73,100.64 89.4,101.31 99.8,101.31 105.66,95.46 U1.14
1S3
  Bottom 0.254: U1.13 105.01,95.26 99.49,100.78 89.47,100.78 89.23,100.53 IC1.33
2S0
  Bottom 0.254: U2.10 69.08,92.94 70.93,94.79 IC1.17
2S1
  Bottom 0.254: U2.11 69.73,92.74 71.28,94.29 IC1.16
2S2
  Bottom 0.254: IC1.15 78.6,93.79 69.73,84.91 U2.14
2S3
  Bottom 0.254: U2.13 79.37,93.29 IC1.14
12V  (via drill 0.45)
  Top 0.813: v97.75,23.46 97.37,23.08 U11.7
  Top 1.016: CON7.+ 100.35,29.91 94.23,23.79
  Top 1.27: 94.23,23.79 93.81,23.37 C36.1 C33.1 | L3.1 160.18,81.91 C23.1 164.33,82.47 U$5.5
  Top 3.8: C23.1 163.78,78.39 158.65,73.26 155,73.26 141.25,59.51 140.75,59.51 124.75,43.51 124.65,43.51 124.65,42.66 119.75,37.76 109,37.76 101.6,30.36 CON7.+
  Bottom 0.508: JP4.1 57.2,22.91 87,22.91 87.55,23.46 v97.75,23.46
  Bottom 0.813: C31.1 97.23,23.99 v97.75,23.46
  Bottom 1.016: CON7.+ 101.6,29.62 97.23,25.24 C31.1
+3.3V  (via drill 0.35)
  Top 0.254: v115.8,49.46 v111.05,45.61 | R9.2 54.82,97.28 v54.8,97.26 | R24.2 121.19,78.4 v121.2,78.41 | R13.2 118.1,97.91 v117.18,96.99 | v61.95,80.26 59.6,77.91 R18.2 | v68.45,128.56 68.45,131.36 v67.43,132.39 | v108.5,131.31 107.43,130.24 v107.43,129.76
  Top 0.406: v61.95,80.26 64.2,78.01 v69.35,78.01 | R24.2 107.03,77.91 v106.57,77.46 | v80.6,92.56 80.6,96.59 v80.65,96.64
  Top 0.508: U4.5 118.4,87.91 v118.2,88.11 118,88.31 118,89.85 119.06,90.91 R14.2 | U3.5 57.55,87.91 v58,87.46 58,85.82 57.09,84.91 R19.2
  Top 0.813: C35.+ 102.53,9.39 100.35,7.21 95.6,7.21 v87.55,15.26 87.55,50.16 v87.15,50.56 | C37.1 116.95,19.21 v116.95,30.91
  Top 1.27: R43.2 101.23,12.91 C35.+ 102.53,12.44 L2.P2 111.35,15.91 C37.1
  Bottom 0.254: C7.1 91.94,92.57 IC1.48 93.67,92.79 C8.1 | C6.1 90.84,99.83 IC1.36 | C5.1 83.8,99.81 IC1.24 | JP1.1 115.76,31.76 C3.1 | P7.2 62.45,128.16 P6.2 53.95,121.51 P5.2 46.8,114.26 P4.2 42.55,105.91 P3.2 40,97.11 P2.2 39.1,87.91 P1.2 40.1,78.26 P32.2 42.75,69.11 P31.2 47.35,60.66 P30.2 54.1,54.31 P29.2 61.9,49.26 P28.2 P27.2 78.6,41.01 P26.2 87.95,40.11 P25.2 97.5,41.01 P24.2 106.3,43.61 P23.2 v111.05,45.61 | v115.8,49.46 P22.2 123.65,56.06 P21.2 P20.2 132.75,67.96 P19.2 136,78.41 137.45,81.26 P18.2 137,87.81 P17.2 136,97.46 P16.2 133.25,106.56 P15.2 128.7,114.56 P14.2 121.95,121.51 P13.2 114.5,127.56 P12.2 109.43,132.24 v108.5,131.31 | C2.1 63.23,84.41 U2.24 | v54.8,97.26 54.8,90.93 R8.2 | v121.2,78.41 121.2,84.9 R23.2 | J2.2 64.23,134.41 P7.2 | v117.18,96.99 113.8,96.99 112.16,95.34 U1.24 112.3,91.59 C1.1 114.83,89.06 117.25,89.06 v118.2,88.11 | v68.45,128.56 68.45,124.69 70.23,122.91 80.23,122.91 80.98,123.66 P9.2 P10.2 95.58,123.66 96.33,122.91 101.79,122.91 106.28,127.4 106.28,128.61 v107.43,129.76 | v67.43,132.39 67.22,132.59 P7.2
  Bottom 0.305: v116.95,30.91 116.11,31.76 JP1.1 | 87,92.79 IC1.48 | C4.1 84,91.6 85.17,92.78 85.53,92.78 85.54,92.79 87,92.79 | IC1.9 86.73,92.52 87,92.79
  Bottom 0.406: C3.1 110.55,36.96 P23.2 | C2.1 61.51,82.46 | 61.51,82.46 61.51,80.71 v61.95,80.26 | v58,87.46 58,85.96 61.51,82.46 | v87.15,50.56 106.53,69.94 106.53,77.41 v106.57,77.46 | v69.35,78.01 70.78,78.01 74.33,74.46 | 80.62,91.29 80.62,92.54 v80.6,92.56 | v80.65,96.64 82.3,98.29 IC1.24 | C8.1 93.89,92.14 95.08,90.96 96.48,90.96 97.13,91.61 97.13,94.39 94.53,96.99 94.53,97.34 92.04,99.83 C6.1
  Bottom 0.508: v118.2,88.11 118.2,87.31 120.6,84.91 R23.2 | v58,87.46 54.82,90.65 R8.2 | JP2.1 57.15,15.26 v87.55,15.26
  Bottom 0.813: v87.15,50.56 87.15,57.29 74.33,70.11 74.33,74.46 74.33,86.34 77.28,89.29 R32.2 80.62,91.29 80.94,91.6 C4.1
  other vias: 121.18,84.91 54.82,90.91
+5V  (via drill 0.35)
  Top 0.254: U9.1 U9.5 14.17,91 v14.35,90.81
  Top 1.27: U10.2 U10.4 72.5,20.62 C29.1 64.85,20.62 C27.1 57.56,18.71 JP3.1
  Bottom 0.254: JP3.1 52.9,39.91 20.35,72.46 20.35,86.01 15.55,90.81 v14.35,90.81
  Bottom 0.508: JP3.1 55.35,20.91 105.18,20.91 JP1.3
  pour Top (no thermals): 76,19.91 76,24.91 75,25.91 70,25.91 69,26.91 69,29.91 68,30.91 63,30.91 61,28.91 61,20.91 64,17.91 71,17.91 73,19.91
+12V
  Top 1.27: U10.3 74.91,16.55 C28.1 80.02,20.46 C26.1
BOOT
  Bottom 0.254: R33.1 93.66,94.79 IC1.44
COM1  (via drill 0.35)
  Top 0.254: v97.3,95.26 94.8,92.76 85.95,92.76 v85.25,93.46 | v104.1,91.41 106.2,89.31 v106.3,89.31
  Bottom 0.254: U1.1 112.24,84.27 R2.2 109.79,85.82 v106.3,89.31 | v97.3,95.26 100.25,95.26 v104.1,91.41 | v85.25,93.46 84.86,93.85 84.86,95.04 84.7,95.21 83.88,95.21 IC1.18
COM2  (via drill 0.35)
  Top 0.254: v76.65,93.36 78.75,95.46 v79.8,95.46
  Bottom 0.254: R4.2 61.62,90 U2.1 63.23,87.69 65,85.91 69.2,85.91 v76.65,93.36 | v79.8,95.46 80.13,95.79 IC1.19
GND  (via drill 0.35)  (2 unrouted)
  other vias: 74.93,124.34 101.53,124.36 119,74.91 116,75.91 118,75.91 117,74.91 129.9,73.66 127.93,73.69 125.6,73.69 60.03,91.89 59.05,92.79 64.15,88.41 65.48,87.16 71.85,92.91 73.95,92.84 72.93,91.89 80.85,87.01 93.95,95.91 116.28,90.26 116.1,87.91 97.1,99.41 98.95,99.36 98.3,98.16 100.35,97.86 79,116.91 79,114.91 79,112.91 79,110.91 79,108.91 77,108.91 77,110.91 77,112.91 77,114.91 75,112.91 75,110.91 73,110.91 73,108.91 75,108.91 77,106.91 79,106.91 88,58.91 90,58.91 92,58.91 88,60.91 86,60.91 90,60.91 92,60.91 94,60.91 94,62.91 92,62.91 90,62.91 88,62.91 86,62.91 90,56.91 92,56.91 157,100.91 159,100.91 157,98.91 159,98.91 157,96.91 159,96.91 161,96.91 161,98.91 161,100.91 163,100.91 163,98.91 163,96.91 165,96.91 165,98.91 165,100.91 159,94.91
  pour Top (isolate 0.305, rank 6, no thermals): 31,186.91 151,186.91 196,141.91 196,35.91 146,-14.09 37,-14.09 -26,48.91 -26,129.91
  pour Bottom (rank 6): 36,183.91 149,183.91 193,139.91 193,39.91 144,-9.09 39,-9.09 -20,49.91 -20,127.91
INA1  (via drill 0.35)
  Top 0.254: U3.3 59.18,90.79 57.05,92.91 R10.1 53.95,92.05 v53.95,91.96 | v42.88,88.77 42.79,88.86 28.5,88.86 27.95,89.41 J4.4
  Bottom 0.254: v53.95,91.96 53.95,90.51 52.4,88.96 43.07,88.96 v42.88,88.77
INA2  (via drill 0.35)
  Top 0.254: U4.1 116.83,89.79 v118.53,91.49 | R15.1 120.44,95.16 v118.05,95.16 117.75,95.16 116.2,96.71 116.2,98.46 102.28,112.39 102.28,116.11 95.83,122.56 46.13,122.56 v43.98,120.41 | v24.4,93.46 24.35,93.41 J4.8
  Bottom 0.254: v118.05,95.16 118.53,94.69 v118.53,91.49 | v24.4,93.46 25.73,94.79 25.73,107.06 32.67,114 37.57,114 v43.98,120.41
INA3  (via drill 0.35)
  Top 0.254: U3.1 59.18,85.89 v57.8,84.51 | v57.6,80.26 57.25,79.91 R20.1 | v42.8,87.45 23.04,87.45 J4.2
  Bottom 0.254: v57.6,80.26 57.8,80.46 v57.8,84.51 54.86,87.45 v42.8,87.45
INA4  (via drill 0.35)
  Top 0.254: R25.1 119.45,82.91 116.83,85.54 U4.3 115.45,86.96 114.03,88.39 114.03,90.59 v114.8,91.36 | v114.83,96.19 114.83,98.39 101.15,112.06 101.15,115.51 95.13,121.54 47.17,121.54 44.98,119.34 v44.98,119.27 | 25.83,92.39 J4.7 27.15,92.41 v27.18,92.39
  Bottom 0.254: v114.8,91.36 114.8,96.16 v114.83,96.19 | v44.98,119.27 38.84,113.14 34.03,113.14 28,107.11 28,93.21 v27.18,92.39
INB1  (via drill 0.35)
  Top 0.254: U3.4 56.83,91.89 v56.65,92.06 | v56.6,97.61 56.6,98.13 R11.1
  Bottom 0.254: v56.65,92.06 56.6,92.06 v56.6,97.61
INB2
  Top 0.254: U4.6 119.23,88.91 R16.1
INB3
  Top 0.254: U3.6 56.78,86.91 R21.1
INB4  (via drill 0.35)
  Top 0.254: U4.4 119.18,84.56 119.98,83.76 v120,83.76 | v120.35,76.96 121.19,76.13 R26.1
  Bottom 0.254: v120,83.76 120,77.31 v120.35,76.96
KICKER
  Top 0.254: U9.2 12.7,93.96 13.3,94.56 15,94.56 19.15,90.41 J4.5 25.73,90.34
KICKER_5V
  Top 0.813: U9.4 R37.1
LG  (via drill 0.35)
  Top 0.254: R7.2 62.11,166.12 J2.1 62.53,144.44 40.25,122.16 v40.15,122.16 | v35.88,116.29 35.88,116.26 29.73,110.11 24.5,110.11 18.23,103.84 18.23,94.76 21.58,91.41 J4.6 | v85.98,90.05 85.34,89.41 78.8,89.41 68.55,99.66 v68.55,103.01 | v70.55,109.04 59.2,120.39 v46.95,120.39
  Bottom 0.254: v35.88,116.29 35.88,117.89 v40.15,122.16 45.18,122.16 v46.95,120.39 | IC1.11 85.73,90.41 85.98,90.16 v85.98,90.05 | v68.55,103.01 68.55,107.04 v70.55,109.04
MOTOR_12V  (via drill 0.45)  (56 unrouted)
  Top 1.016: C15.1 53.23,72.54 C16.1 66.05,70.91 77.8,82.66 | C12.1 53.23,103.29 C11.1 56,104.91 60.5,100.41 60.5,95.16 | C13.1 122.78,103.29 C14.1 121,104.91 v117,100.91 | C17.1 122.78,72.54 C18.1 111.65,70.91 101.65,80.91 | v111.98,98.89 111.98,91.24 111.63,90.89
  Top 2.54: 49.43,95.31 U5.39 49.28,95.16 60.5,95.16 73,82.66 73,82.51 50.63,82.51 U7.39 | 126.48,80.41 U8.39 126.53,80.46 102.1,80.46 101.65,80.91 111.63,90.89 114.1,93.36 125.42,93.36 U6.39 | 97.5,80.41 97,80.91
  Top 5.12: 84.3,76.16 82.55,74.41 82.55,64.41 79.35,61.21 79.35,40.04 74.4,35.09 CON6.+ | 84.3,76.16 89.05,80.91 97,80.91 101.65,80.91 | 84.3,76.16 77.8,82.66 73,82.66
  Bottom 0.508: CON6.+ 77.23,27.09 C32.1
  Bottom 1.016: v117,100.91 114,100.91 v111.98,98.89
N$1
  Bottom 0.254: JP1.2 117.95,28.68 S1.P$1
N$2
  Bottom 0.254: R3.2 111.46,90.41 106.65,90.41 106.31,90.76 U1.15
N$3
  Top 0.254: U5.15 49.75,91.21 50.32,91.78 51.27,91.78 52.4,92.91 R10.2
N$4
  Top 0.254: U5.22 49.75,100.61 50.1,100.96 51.44,100.96 52.49,99.91 R11.2
N$5
  Top 0.254: U5.17 50.8,90.15 50.8,89.21 51.1,88.91 R12.2
N$6
  Top 0.254: U5.16 50.25,91.13 50.49,91.37 52.73,91.37 R8.1
N$7
  Top 0.254: U5.21 50.25,98.51 50.85,97.91 R9.1
N$8  (via drill 0.35)
  Top 0.254: v109.25,122.76 101.23,122.76 v100,121.54 | v67.93,124.16 65.75,124.16 v64,125.91
  Bottom 0.203: D13.1 D14.1 D15.1 132.8,101.61 D16.1 134.66,95.75 136.8,93.61 136.8,90.91 135.7,89.81 135.7,88.04 D17.1 135.58,86.24 136.8,85.01 136.8,81.51 134.66,79.37 D18.1 133.19,75.06 D19.1 127.56,65.31 D20.1 126.17,61.48 121.04,56.35 D21.1 118.95,55.27 D22.1 D23.1 D24.1 D25.1 D26.1 D27.1 64.1,50.35 D28.1 57.75,55.17 D29.1 48.75,61.48 D30.1 46.8,65.85 D31.1 42.99,74.16 D32.1 39.3,82.31 39.2,83.51 D1.1 39.26,91.99 39.2,93.31 D2.1 D3.1 48.44,110.51 D4.1 50.03,114.34 55.06,119.37 D5.1 56.75,120.75 D6.1 65.58,127.07 D11.1
  Bottom 0.254: D13.1 120.17,120.55 116.68,123.37 113.58,126.47 D12.1 | D12.1 105.54,132.26 | 105.54,132.26 D7.1 | J1.2 111.67,138.39 105.54,132.26 | D10.1 | D10.1 93.9,122.91 92.8,122.91 D9.1 84.7,121.99 83.7,122.98 81.9,122.98 80.4,121.49 D8.1 70.6,121.49 v67.93,124.16 | D12.1 109.77,122.76 v109.25,122.76 | v100,121.54 99.95,121.49 D10.1 | v64,125.91 63.07,126.84 D6.1
  Bottom 0.406: D22.1 112,48.32 112,38.59 R1.1
N$9
  Bottom 0.254: R5.2 64.18,85.46 68.65,85.46 69.08,85.04 U2.15
N$10
  Bottom 0.254: S1.P$2 120,30.59 R1.2
N$11
  Top 0.254: R29.2 D36.A D35.C
N$12  (via drill 0.35)
  Top 0.254: v93.3,41.21 93.25,41.21 v93.25,42.56
  Bottom 0.254: P25.1 93.05,41.21 v93.3,41.21 | v93.25,42.56 107.61,56.92 U1.8
N$13
  Bottom 0.254: P17.1 134.89,91.51 125.7,91.51 119.13,98.09 113.1,98.09 110.86,95.84 U1.22
N$14
  Bottom 0.254: P18.1 133.7,85.5 133.7,87.16 131.3,89.56 126.65,89.56 118.57,97.64 113.48,97.64 111.51,95.67 U1.23
N$15
  Top 0.254: R28.2 D34.A 31.3,95.32 30.57,94.58 30.57,93.74 31.3,93 D33.C
N$16  (via drill 0.35)
  Top 0.254: v133.5,73.16 132.7,73.16 v132.2,73.66
  Bottom 0.254: P19.1 134.17,73.83 v133.5,73.16 | v132.2,73.66 131.18,72.64 117.63,72.64 111.51,78.76 U1.2
N$17  (via drill 0.35)
  Top 0.254: v129.1,62.66 126.3,62.66 v124.1,60.46
  Bottom 0.254: P20.1 130.55,64.11 v129.1,62.66 | v124.1,60.46 124.1,65.01 110.86,78.26 U1.3
N$18  (via drill 0.35)
  Top 0.254: v124.25,58.36 123.2,59.41 v123.2,59.56
  Bottom 0.254: P21.1 124.34,58.36 v124.25,58.36 | v123.2,59.56 110.21,72.56 U1.4
N$19  (via drill 0.35)
  Top 0.254: v116.9,52.26 116,53.16 v116,53.46
  Bottom 0.254: P22.1 116.9,52.12 v116.9,52.26 | v116,53.46 109.56,59.91 U1.5
N$21  (via drill 0.35)
  Top 0.254: v109.9,46.56 109.9,46.76 v109.05,47.61
  Bottom 0.254: P23.1 109.85,46.51 v109.9,46.56 | v109.05,47.61 108.91,47.76 U1.6
N$22  (via drill 0.35)
  Top 0.254: v102.7,43.16 102.05,43.81 v102.05,44.26
  Bottom 0.254: P24.1 102.43,43.16 v102.7,43.16 | v102.05,44.26 108.26,50.47 U1.7
N$23
  Bottom 0.254: P10.1 93.94,121.22 94.72,121.22 106.96,108.98 U1.16
N$24  (via drill 0.35)
  Top 0.254: v110.3,129.91 108.44,128.05 v108.26,128.05
  Bottom 0.254: P12.1 110.3,130.41 v110.3,129.91 | v108.26,128.05 107.61,127.4 107.61,114.84 107.6,114.84 107.6,91.83 107.61,91.83 U1.17
N$25  (via drill 0.35)
  Top 0.254: v118.3,123.01 117.15,123.01 v116.55,122.41
  Bottom 0.254: P13.1 118.3,123.62 v118.3,123.01 | v116.55,122.41 108.26,114.12 U1.18
N$26  (via drill 0.35)
  Top 0.254: v125.4,116.91 124.25,116.91 v123.85,116.51
  Bottom 0.254: P14.1 125.1,117.21 v125.4,116.91 | v123.85,116.51 108.91,101.57 U1.19
N$27  (via drill 0.35)
  Top 0.254: v129.7,111.31 129.15,111.31 v128.45,110.61
  Bottom 0.254: P15.1 129.9,111.31 v129.7,111.31 | v128.45,110.61 120.2,110.61 109.56,99.97 U1.20
N$28  (via drill 0.35)
  Top 0.254: v133.4,102.66 133.15,102.91 132.4,102.91 v131.85,102.36
  Bottom 0.254: P16.1 133.43,102.66 v133.4,102.66 | v131.85,102.36 113.5,102.36 110.21,99.07 U1.21
N$29
  Bottom 0.254: P9.1 82.06,121.22 81.28,121.22 67.78,107.71 U2.8
N$30  (via drill 0.35)
  Top 0.254: v55.69,79.06 55.85,79.06 56,78.91 59.5,78.91 v59.55,78.96
  Bottom 0.254: P1.1 41.26,84.46 50.29,84.46 v55.69,79.06 | U2.23 63.88,80.64 62.2,78.96 v59.55,78.96
N$31
  Bottom 0.254: P2.1 41.86,90.76 49.62,90.76 51.34,92.48 51.34,95.48 54.42,98.56 58.25,98.56 63.88,92.94 U2.2
N$32  (via drill 0.35)
  Top 0.254: v41.7,101.16 42.65,101.16 v43.45,101.96
  Bottom 0.254: P3.1 41.83,101.29 v41.7,101.16 | v43.45,101.96 55.8,101.96 64.53,93.24 U2.3
N$33  (via drill 0.35)
  Top 0.254: v46.1,110.26 46.55,110.26 v47.9,108.91
  Bottom 0.254: P4.1 45.84,110.26 v46.1,110.26 | v47.9,108.91 49.75,108.91 65.2,93.46 65.2,91.63 U2.4
N$34  (via drill 0.35)
  Top 0.254: v51.15,114.49 50.4,115.24 v50.4,115.76
  Bottom 0.254: v50.4,115.76 51.3,116.66 P5.1 | v51.15,114.49 65.83,99.81 U2.5
N$35  (via drill 0.35)
  Top 0.254: v61.85,124.84 61.68,124.84 v60.78,125.74
  Bottom 0.254: v60.78,125.74 59.92,125.74 P6.1 | v61.85,124.84 66.48,120.21 U2.6
N$36  (via drill 0.35)
  Top 0.254: v67.5,127.91 66.8,128.61 v66.8,129.36
  Bottom 0.254: U2.7 67.13,127.54 v67.5,127.91 | v66.8,129.36 66.8,131.22 P7.1
N$37  (via drill 0.35)
  Top 0.254: v84.85,40.86 84.85,42.36 v84.8,42.41
  Bottom 0.254: P26.1 84.82,40.89 v84.85,40.86 | v84.8,42.41 68.43,58.79 U2.16
N$38  (via drill 0.35)
  Top 0.254: v73.4,42.96 73.4,44.31 v73.3,44.41
  Bottom 0.254: P27.1 73.77,42.96 v73.4,42.96 | v73.3,44.41 73.3,53.01 67.78,58.54 U2.17
N$39  (via drill 0.35)
  Top 0.254: v65.85,47.26 65.85,48.61 v66.35,49.11
  Bottom 0.254: P28.1 65.76,47.17 v65.85,47.26 | v66.35,49.11 67.13,49.89 U2.18
N$40  (via drill 0.35)
  Top 0.254: v60.05,53.81 58.9,52.66 v58.8,52.66
  Bottom 0.254: U2.19 66.48,60.24 v60.05,53.81 | v58.8,52.66 58.8,52.62 P29.1
N$41  (via drill 0.35)
  Top 0.254: v51.5,57.71 51.5,58.26 v52.2,58.96
  Bottom 0.254: P30.1 v51.49,57.71 v51.5,57.71 | v52.2,58.96 65.83,72.59 U2.20
N$42  (via drill 0.35)
  Top 0.254: v50.75,61.16 49.1,62.81 v47,62.81
  Bottom 0.254: U2.21 65.18,74.69 51.65,61.16 v50.75,61.16 | v47,62.81 45.45,64.36 P31.1
N$43  (via drill 0.35)
  Top 0.254: v42.4,73.71 42.55,73.86 v43.7,73.86
  Bottom 0.254: P32.1 42.02,73.71 v42.4,73.71 | v43.7,73.86 60.2,73.86 64.53,78.19 U2.22
N$45
  Top 0.508: C34.2 96.1,19.86 U11.8
  Top 0.813: U11.8 96.1,23.61 97.25,24.76 102.1,24.76 104.95,21.91
  Top 1.27: L2.P1 104.95,21.91 104,21.91
  Top 2.54: D46.C 106.05,21.86 L2.P1
N$46
  Top 0.254: D41.A 6.77,105.56 R34.2
N$47
  Top 0.254: U6.15 126.25,98.56 125.55,97.86 124.5,97.86 122.82,96.18 R15.2
N$48
  Top 0.254: U6.22 126.2,90.15 126.2,89.21 125.9,88.91 R16.2
N$49
  Top 0.254: U6.17 125.2,99.67 125.2,100.61 125.02,100.8 123.54,100.8 122.82,100.08 R17.2
N$50
  Top 0.254: U6.16 125.75,98.69 125.43,98.36 123.27,98.36 R13.1
N$51
  Top 0.254: R14.1 123.47,91.56 125.33,91.56 125.7,91.18 125.7,90.24 U6.21
N$52
  Bottom 0.254: D42.A R35.2
N$54
  Top 0.254: R30.2 D38.A D37.C
N$56
  Top 1.27: D44.A 6.81,91.56 R36.2
  Top 2.54: 30.65,71.16 18.84,82.97 Q27.D
  Top 3.8: CON5.+ 65.33,66.51 41.8,66.51 37.15,71.16 30.65,71.16
  Bottom 0.508: R36.2 8.96,88.25 14.24,82.97 Q27.D
N$57
  Top 0.254: U7.15 49.75,77.31 50.55,78.11 51.5,78.11 53.19,79.8 R20.2
N$58
  Top 1.27: R36.1 C21.1
N$59
  Top 0.254: U7.22 49.8,85.67 49.8,86.61 50.1,86.91 R21.2
N$60
  Top 0.254: U7.17 50.8,76.15 50.8,75.21 50.99,75.02 51.52,75.02 52.4,75.91 R22.2
N$61
  Top 0.254: R18.1 52.79,77.51 50.63,77.51 50.25,77.14 U7.16
N$62
  Top 0.254: U7.21 50.3,85.58 50.3,84.64 50.49,84.45 51.52,84.45 51.97,84.91 R19.1
N$63
  Top 0.254: R31.2 D40.A 145.24,81.94 145.24,83.23 D39.C
N$64
  Top 1.27: D43.1 5.94,71.7 D44.C
N$65
  Top 0.813: Q27.G 15.7,86.35 11.76,86.35
  Top 1.27: R37.2 11.76,86.35 R38.2
N$66
  Top 1.016: L3.2 153.69,81.89 152.2,83.37 152.2,86.92 D45.1 154.78,86.76 161.9,86.76 162.63,87.49 U$5.4
N$67
  Top 1.016: R39.2 155.85,95.1 157.53,93.42 U$5.1
N$68
  Top 0.254: R25.2 123.83,82.91 124.61,83.69 125.33,83.69 126.25,84.61 U8.15
N$69
  Top 0.254: U8.22 126.25,75.11 126,74.86 123.87,74.86 R26.2
N$70
  Top 0.254: U8.17 125.2,85.67 125.2,86.61 124.9,86.91 R27.2
N$71
  Top 0.254: R23.1 123.38,84.91 124.09,84.2 125.27,84.2 125.75,84.69 U8.16
N$72
  Top 0.254: U8.21 125.75,77.41 125.25,77.91 R24.1
N$73
  Top 1.016: C22.1 R39.1
N$74
  Top 1.016: R42.3 171.47,90.73 R41.1
N$75
  Top 1.016: R42.2 R42.1 171.47,95.1 R40.2 162.19,95.1 159.23,92.14 U$5.2
N$76  (via drill 3 pad 5)
  other vias: 56.04,44.61
N$77  (via drill 3 pad 5)
  other vias: 35.18,65.46
N$78  (via drill 3 pad 6)
  other vias: 10.4,62.88
N$79  (via drill 3 pad 5)
  other vias: 10.35,112.9
N$80  (via drill 3 pad 5)
  other vias: 35.18,110.36
N$81  (via drill 3 pad 6)
  other vias: 56.04,131.22
N$82  (via drill 3 pad 5)
  other vias: 72.5,128.56
N$83  (via drill 3 pad 5)
  other vias: 103.5,128.56
N$84  (via drill 3 pad 6)
  other vias: 119.96,131.22
N$85  (via drill 3 pad 6)
  other vias: 140.82,110.36
N$86  (via drill 3 pad 5)
  other vias: 165.65,112.9
N$87  (via drill 3 pad 5)
  other vias: 165.65,62.92
N$88  (via drill 3 pad 4.5)
  other vias: 140.82,65.46
N$89  (via drill 3 pad 4.5)
  other vias: 119.96,44.61
N$90  (via drill 3 pad 5)
  other vias: 124.24,11.85
N$91  (via drill 3 pad 5)
  other vias: 51.76,11.85
N$96
  Top 0.508: U11.4 99.91,15.27 98.15,13.51 R43.1 R44.2
N$97
  Top 0.508: U11.1 95.71,16.06 C34.1
O_IN
  Bottom 0.254: IC1.5 88.73,87.65 Q26.1 91.17,85.68 C9.1
O_OUT
  Bottom 0.254: IC1.6 88.23,89.54 Q26.3 86.14,87.45 C10.1
OA1  (7 unrouted)
  Top 0.254: D34.C 33.25,94.16 CON1.- 33.8,92.41 32.4,91.01 D33.A
  pour Top (isolate 0.305, no thermals): 33,94.71 33,89.91 40,89.91 42,91.91 47,91.91 47,94.71
OA2  (7 unrouted)
  Top 0.254: D37.A D38.C 141.25,97.16 CON2.-
  pour Top (isolate 0.305, no thermals): 143,95.11 143,99.91 136,99.91 134,97.91 129,97.91 129,95.11
OA3  (7 unrouted)
  Top 0.254: D35.A D36.C 34.75,78.66 CON3.-
  pour Top (isolate 0.305, no thermals): 33,80.71 33,75.91 40,75.91 42,77.91 47,77.91 47,80.71
OA4  (7 unrouted)
  Top 0.254: 141.25,83.16 CON4.- | D39.A 143.15,85.56 CON4.- | D40.C 141.8,82.61 CON4.-
  pour Top (isolate 0.305, no thermals): 143,81.11 143,85.91 136,85.91 134,83.91 129,83.91 129,81.11
OB1  (7 unrouted)
  Top 0.254: CON1.+ 33.69,98.73 R28.1
  pour Top (isolate 0.305, no thermals): 47,95.11 33,95.11 33,99.91 40,99.91 42,97.91 47,97.91
OB2  (7 unrouted)
  Top 0.254: CON2.+ 141.19,92.6 R30.1
  pour Top (isolate 0.305, no thermals): 129,94.71 143,94.71 143,89.91 136,89.91 134,91.91 129,91.91
OB3  (7 unrouted)
  Top 0.254: CON3.+ 34.82,83.23 R29.1
  pour Top (isolate 0.305, no thermals): 47,81.11 33,81.11 33,85.91 40,85.91 42,83.91 47,83.91
OB4  (7 unrouted)
  Top 0.254: CON4.+ 141.19,78.6 141.54,78.25 R31.1
  pour Top (isolate 0.305, no thermals): 129,80.71 143,80.71 143,75.91 136,75.91 134,77.91 129,77.91
PC13
  Bottom 0.254: R35.1 95.45,89.46 91.31,89.46 90.23,90.55 IC1.2
PWM1  (via drill 0.35)
  Top 0.254: R12.1 54.82,88.78 v54.25,88.21 | v42.16,88.11 42.13,88.13 26.08,88.13 J4.3
  Bottom 0.254: v54.25,88.21 54.15,88.11 v42.16,88.11
PWM2  (via drill 0.35)
  Top 0.254: R17.1 120.24,98.96 116.45,98.96 102.93,112.49 102.93,116.56 96.33,123.16 45.6,123.16 v43.9,121.46 | v24.45,95.54 24.33,95.41 J4.10
  Bottom 0.254: v24.45,95.54 24.45,106.74 32.13,114.41 36.85,114.41 v43.9,121.46
PWM3  (via drill 0.35)
  Top 0.254: R22.1 54.3,76.43 v54.3,76.46 | J4.1 25.93,86.41 26.45,86.94 41.89,86.94 v42.03,86.8
  Bottom 0.254: v54.3,76.46 56.8,78.96 56.8,84.46 54.46,86.8 v42.03,86.8
PWM4  (via drill 0.35)
  Top 0.254: v120.68,87.61 120.68,87.42 R27.1 | v115.53,95.41 115.53,98.39 101.68,112.24 101.68,115.86 95.5,122.04 46.65,122.04 v44.9,120.29 | v27.13,94.56 26.98,94.41 J4.9
  Bottom 0.254: v120.68,87.61 120.23,87.61 116.03,91.81 116.03,94.91 v115.53,95.41 | v27.13,94.56 27.13,107.34 33.33,113.54 38.16,113.54 v44.9,120.29
RST
  Bottom 0.254: IC1.7 87.73,89.91 87.73,89.89 86.81,88.97 86.75,88.91 84.13,88.91 81.22,86 U$1.P$2 80.03,85.97 C19.2 78.54,87.58 R32.1
RX1  (via drill 0.35)
  Top 0.254: J3.6 9.66,96.66 23.76,110.76 29.42,110.76 35.65,116.99 58.53,116.99 75.86,99.66 82.4,99.66 86.76,95.3 v89.4,95.3
  Bottom 0.254: IC1.43 89.67,95.29 89.66,95.3 v89.4,95.3
RX2  (via drill 0.35)
  Top 0.254: v82.65,92.61 82.65,98.21 82.13,98.74 75.53,98.74 60.68,113.59 43.63,113.59 35.88,105.84 24.65,105.84 24.08,105.26 24.08,98.14 23.35,97.41 J4.12 23.2,97.41
  Bottom 0.254: IC1.13 82.83,92.79 v82.65,92.61
SWCLK  (via drill 0.35)
  Top 0.254: J3.2 11.63,100.66 22.78,111.81 28.85,111.81 35.13,118.09 59.53,118.09 76.75,100.86 82.95,100.86 87.5,96.32 88.75,96.32 88.8,96.37 89.66,96.37 v90.3,97.01
  Bottom 0.254: v90.3,97.01 91.1,97.81 91.1,98.04 91.34,98.29 IC1.37
SWD_3V3
  Top 0.254: C20.1 9.78,105.6 R34.1 8.44,104.8 6.45,102.81 6.45,99.41 7.2,98.66 J3.4
SWDIO  (via drill 0.35)
  Top 0.254: v11.48,101.43 22.45,112.41 28.7,112.41 34.8,118.51 59.95,118.51 77,101.46 83.2,101.46 87.69,96.97 v88.48,96.97 | v9.6,99.66 J3.3
  Bottom 0.254: v11.48,101.43 9.7,99.66 v9.6,99.66 | IC1.34 89.73,98.23 v88.48,96.97
TX1  (via drill 0.35)
  Top 0.254: 76.14,100.22 76.05,100.31 | J3.5 9.61,97.66 23.26,111.31 29.15,111.31 35.36,117.52 58.86,117.52 76.14,100.23 76.14,100.22 | 76.14,100.22 82.59,100.22 86.15,96.66 86.9,95.91 88.92,95.91 88.97,95.96 v90.3,95.96
  Bottom 0.254: IC1.42 90.47,95.79 v90.3,95.96
TX2  (via drill 0.35)
  Top 0.254: v85.07,90.26 82.55,90.26 81.53,91.29 81.53,97.84 81.33,98.04 75.18,98.04 60.7,112.51 43.55,112.51 36.35,105.31 25.38,105.31 24.6,104.54 24.6,100.91 24.6,100.61 24.6,97.61 J4.11
  Bottom 0.254: IC1.12 85.23,90.42 v85.07,90.26
VCC  (via drill 0.45)
  Top 1.016: R41.2 166.92,89.1 v166.8,89.21 | D45.2 155.05,90.71 v155.05,90.41
  Top 2.54: 35.85,59.26 35.2,59.26 22.48,71.99 C24.1 15.01,71.99 D43.2
  Top 3.8: CON5.- 76.93,69.61 64.58,57.26 55.5,57.26 50.5,52.26 42.85,52.26 35.85,59.26 | D45.2 150.89,92.35 148.5,89.96 148.5,76.26 144.05,71.81 139.15,71.81 133.25,65.91 96.13,65.91 C25.1
  Bottom 1.016: JP5.1 166.8,98.71 v166.8,89.21 165.6,90.41 v155.05,90.41
  Bottom 3.8: C25.1 88.98,73.06 76.98,73.06 CON5.-

## Text on the board
tPlace: led | 60v | and | not | not | k i d z | motor | else | 12v | 5v | 3.3v | サッカーロボット
bPlace: JLCJLCJLCJLC